# EAGLE board CapMeter-LCD-16F876A (EAGLE 7.7.0)
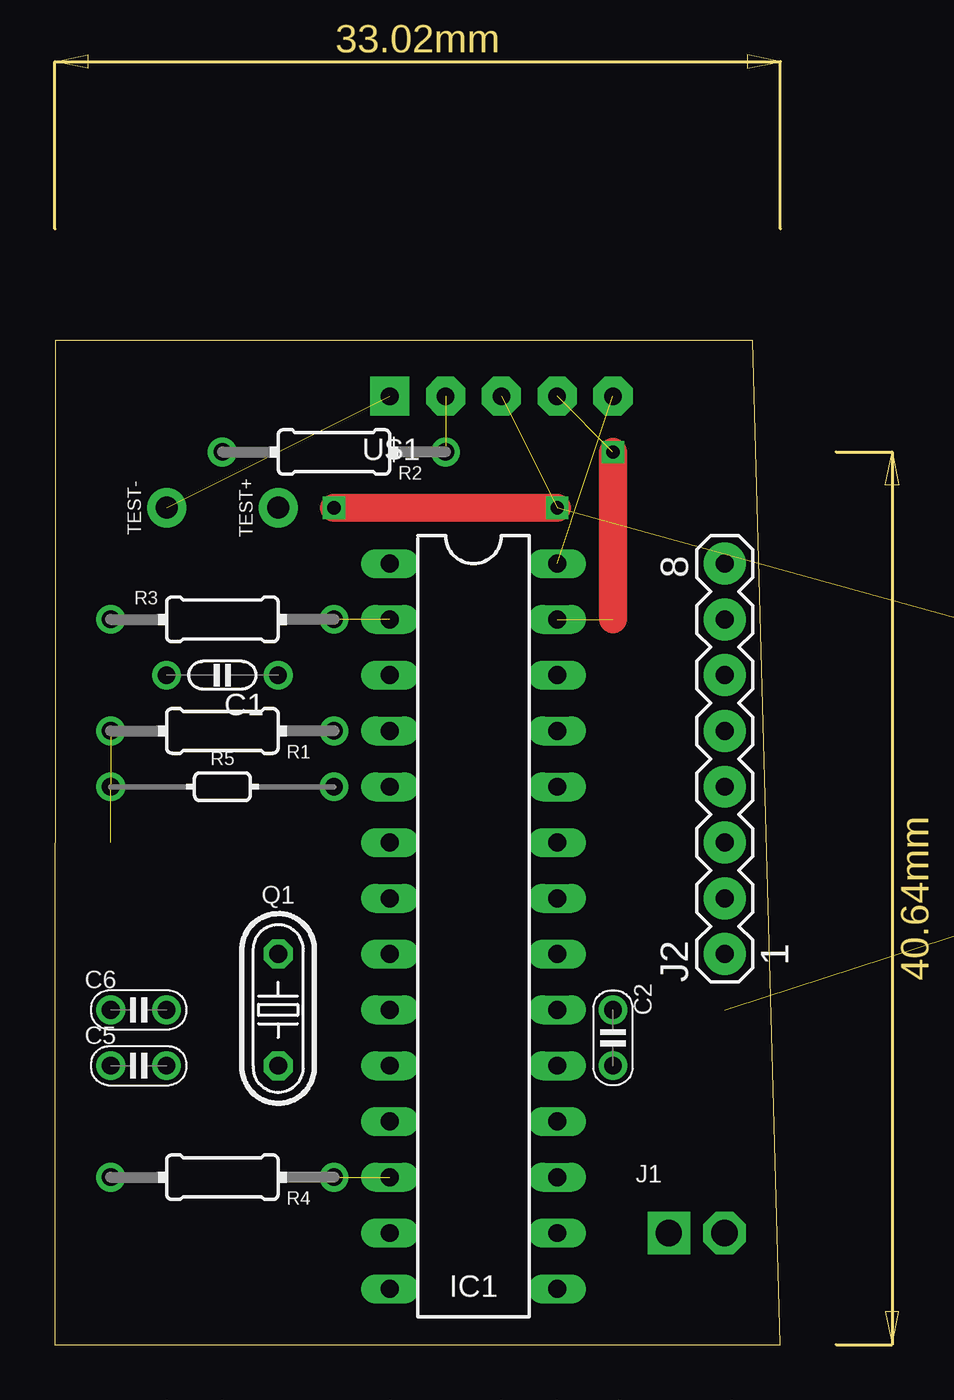
[diagram p0: board, top side]
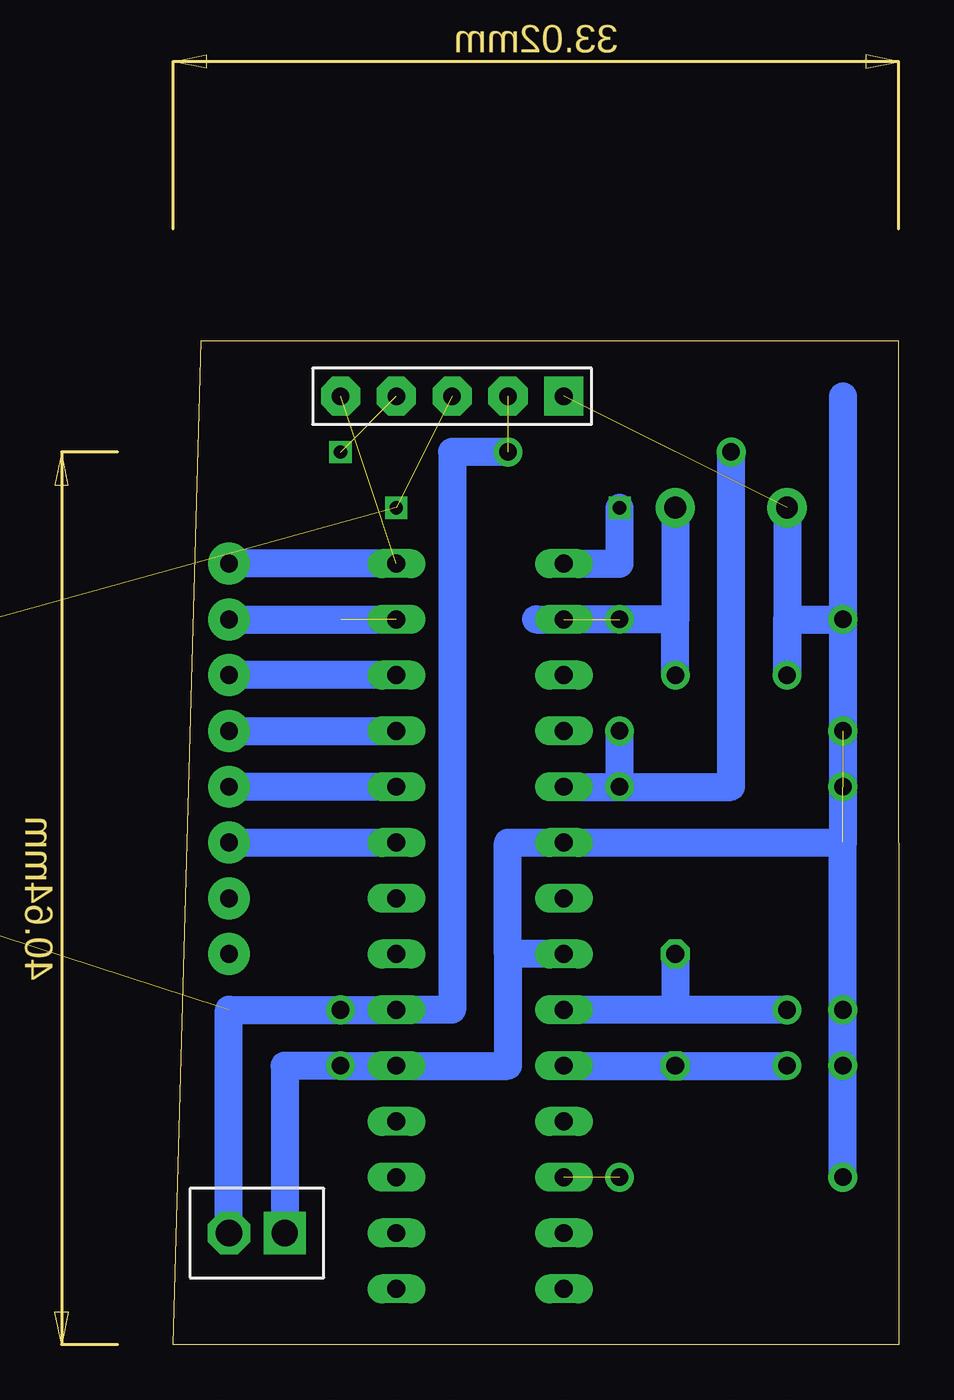
[diagram p1: board, bottom side, seen from below]

Size 33.02 x 45.72 mm. Coordinates in mm from the lower left corner, seen from the top.
Outline: 31.75,45.72 0.02,45.72 0,0 33.02,0 31.75,45.72
Copper layers (1*16): Top 0.035mm / dielectric 1.5mm / Bottom 0.035mm
Design rules "default": minimum track width 10mil, minimum drill 24mil, track to track 8mil, track to pad 8mil, pad to pad 8mil, via to via 8mil, smd to smd 8mil, copper to edge 40mil, drill to drill 8mil, minimum pad ring 10mil, minimum via ring 8mil, stop-mask expansion 4mil, vias tented up to drill 0mil, thermal gap 10mil
Net classes: 0 default: width 0.61 mm

## Footprints (pad centres in the part's own frame; a part is rotated, then mirrored left to right if it is on the bottom)
C050-020X036 = drill 0.8: 1 0,-2.54; 2 0,2.54
C025-020X036 = drill 0.8: 1 -1.27,0; 2 1.27,0
DIL28-3/V = drill 0.813 long: 1 -3.81,16.51; 2 -3.81,13.97; 3 -3.81,11.43; 4 -3.81,8.89; 5 -3.81,6.35; 6 -3.81,3.81; 7 -3.81,1.27; 8 -3.81,-1.27; 9 -3.81,-3.81; 10 -3.81,-6.35; 11 -3.81,-8.89; 12 -3.81,-11.43; 13 -3.81,-13.97; 14 -3.81,-16.51; 15 3.81,-16.51; 16 3.81,-13.97; 17 3.81,-11.43; 18 3.81,-8.89; 19 3.81,-6.35; 20 3.81,-3.81; 21 3.81,-1.27; 22 3.81,1.27; 23 3.81,3.81; 24 3.81,6.35; 25 3.81,8.89; 26 3.81,11.43; 27 3.81,13.97; 28 3.81,16.51
CONN-2P = drill 1.2 pad 1.93 square: 1 -1.27,0 | drill 1.2 pad 1.93 octagon: 2 1.27,0
1X8 = drill 0.813 pad 1.905: 1 -8.89,0; 2 -6.35,0; 3 -3.81,0; 4 -1.27,0; 5 1.27,0; 6 3.81,0; 7 6.35,0; 8 8.89,0
HC49 = drill 0.813 octagon: 1 0,-2.54; 2 0,2.54
0204/10 = drill 0.8: 1 -5.08,0; 2 5.08,0
0202/10 = drill 0.8: 1 -5.08,0; 2 5.08,0
0204/10-V = drill 0.8: 1 0,5.08; 2 0,-5.08
SPAD = drill 1 pad 1.778: 1 0,0
PIC-ICSP = drill 0.8 pad 1.778 square: 1 0,0 | drill 0.8 pad 1.778 octagon: 2 2.54,0; 3 5.08,0; 4 7.62,0; 5 10.16,0

## Placement (x,y rotation side)
C1  270pF  [C050-020X036]  7.62,30.48 90 top
C2  100nF  [C025-020X036]  25.4,13.97 270 top
C5  33pF  [C025-020X036]  3.81,12.7 0 top
C6  33pF  [C025-020X036]  3.81,15.24 0 top
IC1  PIC16F876A-X/SP-COMPDIL28-3/V  [DIL28-3/V]  19.05,19.05 0 top
J1  CONN-2P2P/H  [CONN-2P]  29.21,5.08 0 top
J2  LCD-8PIN  [1X8]  30.48,26.67 90 top
Q1  20MHz  [HC49]  10.16,15.24 0 top
R1  1.5k  [0204/10]  7.62,27.94 180 top
R2  1.5k  [0204/10]  12.7,40.64 180 top
R3  10k  [0204/10]  7.62,33.02 0 top
R4  1.5k  [0204/10]  7.62,7.62 180 top
R5  1.5k  [0202/10]  7.62,25.4 0 top
R6  10k  [0204/10-V]  64.77,27.94 270 top  (outside the outline)
TEST+  SPAD  [SPAD]  10.16,38.1 0 top
TEST-  SPAD  [SPAD]  5.08,38.1 0 top
U$1  PIC-ICSPICSP  [PIC-ICSP]  15.24,43.18 0 top

## Library data of the parts
C1 C2 C5 C6 = c
IC1 = mcu
J1 U$1 = pinconn
J2 = lcd
Q1 = q
R1-R6 = r
TEST+ TEST- = pad

## Nets
D4: IC1.25 J2.5
D5: IC1.26 J2.6
D6: IC1.27 J2.7 U$1.4
D7: IC1.28 J2.8 U$1.5
E: IC1.24 J2.4
GND: C1.2 C2.2 C5.1 C6.1 IC1.8 IC1.19 J1.1 R1.2 TEST-.1 U$1.1
N$1: IC1.2 R3.2 TEST+.1
N$2: IC1.6 R3.1 R4.2 R5.1
N$3: IC1.5 R1.1 R2.2 R5.2
N$4: IC1.11
N$6: IC1.1 R6.2 U$1.3
N$7: C1.1
OSC1: C6.2 IC1.9 Q1.2
OSC2: C5.2 IC1.10 Q1.1
RC1: IC1.12 R4.1
RS: IC1.23 J2.3
VCC: C2.1 IC1.20 J1.2 R2.1 R6.1 U$1.2

## Tracks (layer width: path | path; a pad name or v marks a point on that pad's centre or on a via)
D4
  Bottom 1.27: J2.5 IC1.25
D5
  Bottom 1.27: IC1.26 J2.6
D6  (via drill 0.6)  (2 unrouted)
  Top 1.27: v25.4,40.64 25.4,33.02
  Bottom 1.27: J2.7 IC1.27
D7  (1 unrouted)
  Bottom 1.27: IC1.28 J2.8
E
  Bottom 1.27: IC1.24 J2.4
GND  (3 unrouted)
  Bottom 1.27: C5.1 C6.1 2.54,22.86 17.78,22.86 17.78,17.78 | 17.78,17.78 17.78,12.7 IC1.19 C2.2 27.94,12.7 J1.1 | TEST-.1 C1.2 5.08,33.02 2.54,33.02 | IC1.8 17.78,17.78 | 2.54,33.02 2.54,25.4 | 2.54,43.18 2.54,33.02
N$1  (1 unrouted)
  Bottom 1.27: TEST+.1 10.16,33.02 IC1.2 16.51,33.02
N$2  (1 unrouted)
  Bottom 1.27: IC1.6 2.54,22.86 | 2.54,22.86 2.54,24.13 R3.1 | R4.2 2.54,22.86
N$3
  Bottom 1.27: R2.2 7.62,25.4 IC1.5 R5.2 R1.1
N$6  (via drill 0.6)  (2 unrouted)
  Top 1.27: v12.7,38.1 v22.86,38.1
  Bottom 1.27: IC1.1 12.7,35.56 v12.7,38.1
N$7
  Bottom 1.27: C1.1 10.16,33.02
OSC1
  Bottom 1.27: C6.2 10.16,15.24 | Q1.2 10.16,15.24 | 10.16,15.24 IC1.9
OSC2
  Bottom 1.27: IC1.10 Q1.1 C5.2
RC1  (1 unrouted)
RS
  Bottom 1.27: J2.3 IC1.23
VCC  (2 unrouted)
  Bottom 1.27: J1.2 30.48,15.24 C2.1 IC1.20 20.32,15.24 20.32,40.64 R2.1

## Text on the board
Dimension: 15 | 14 | 13 | 12 | 11 | 10 | 9 | 8 | 7 | 6 | 5 | 4 | 3 | 2 | 1 | 1 | 2 | 3 | 4 | 5 | 6 | 7 | 8 | 9 | 10 | 11 | 12